# Altium PCB VBAT_to_12V.PcbDoc
Units mm, origin at the board's own origin, x right, y up, seen from the top; angles counter-clockwise.
Board outline 82.04 x 37.08 mm, 4 copper layers (Layer 1 (TOP), Layer 2 (GND), Layer 3 (GND), Layer 4 (BOTTOM)), stack 0.603 mm thick; 28 components, 38 nets, 82 pads, 112 vias.
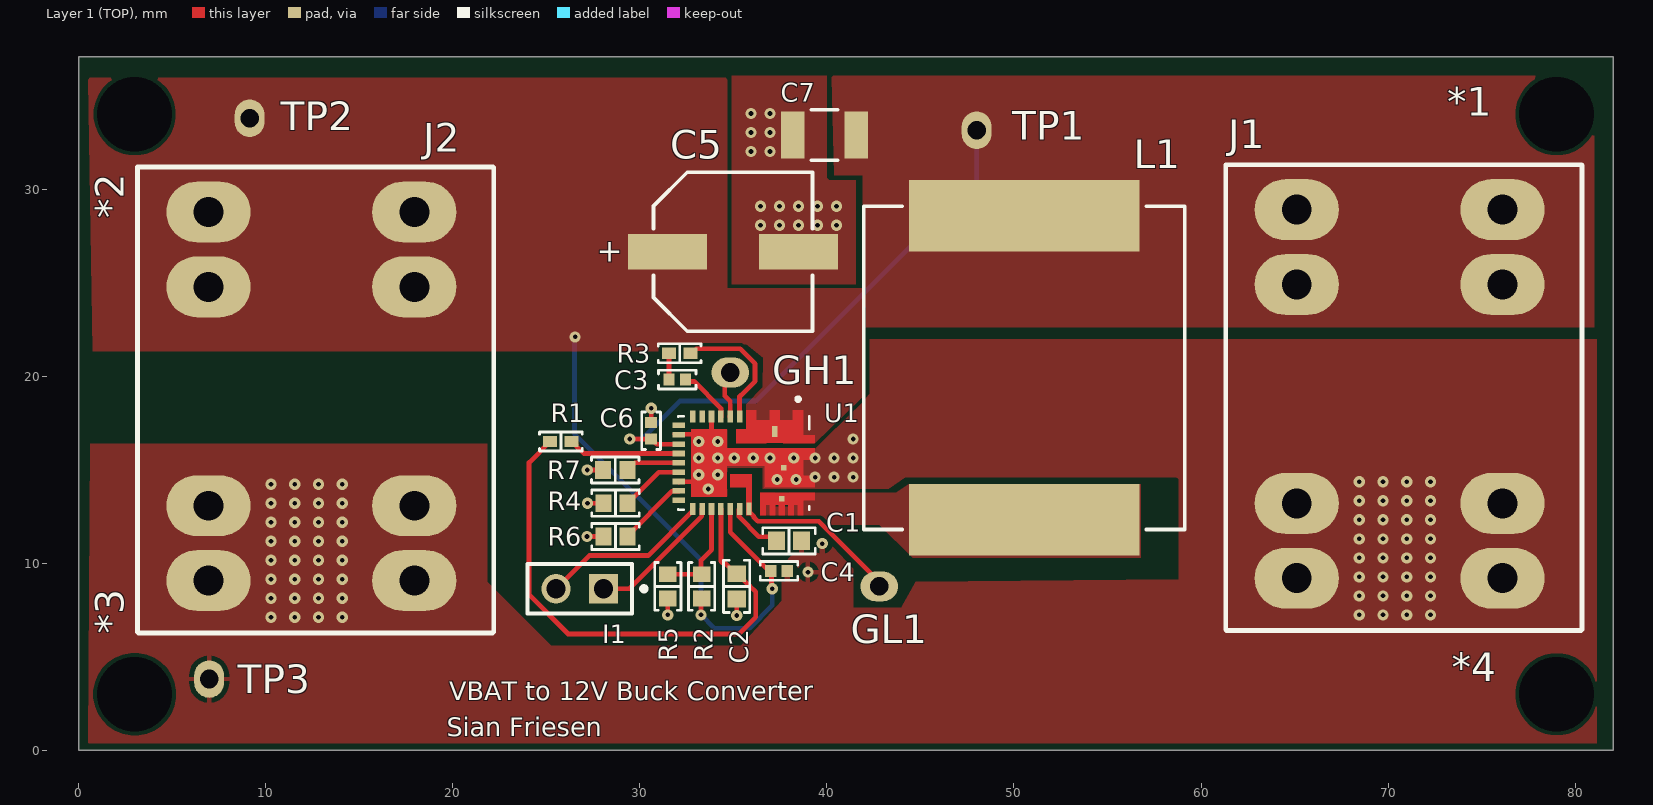
[diagram p0: Layer 1 (TOP) view]
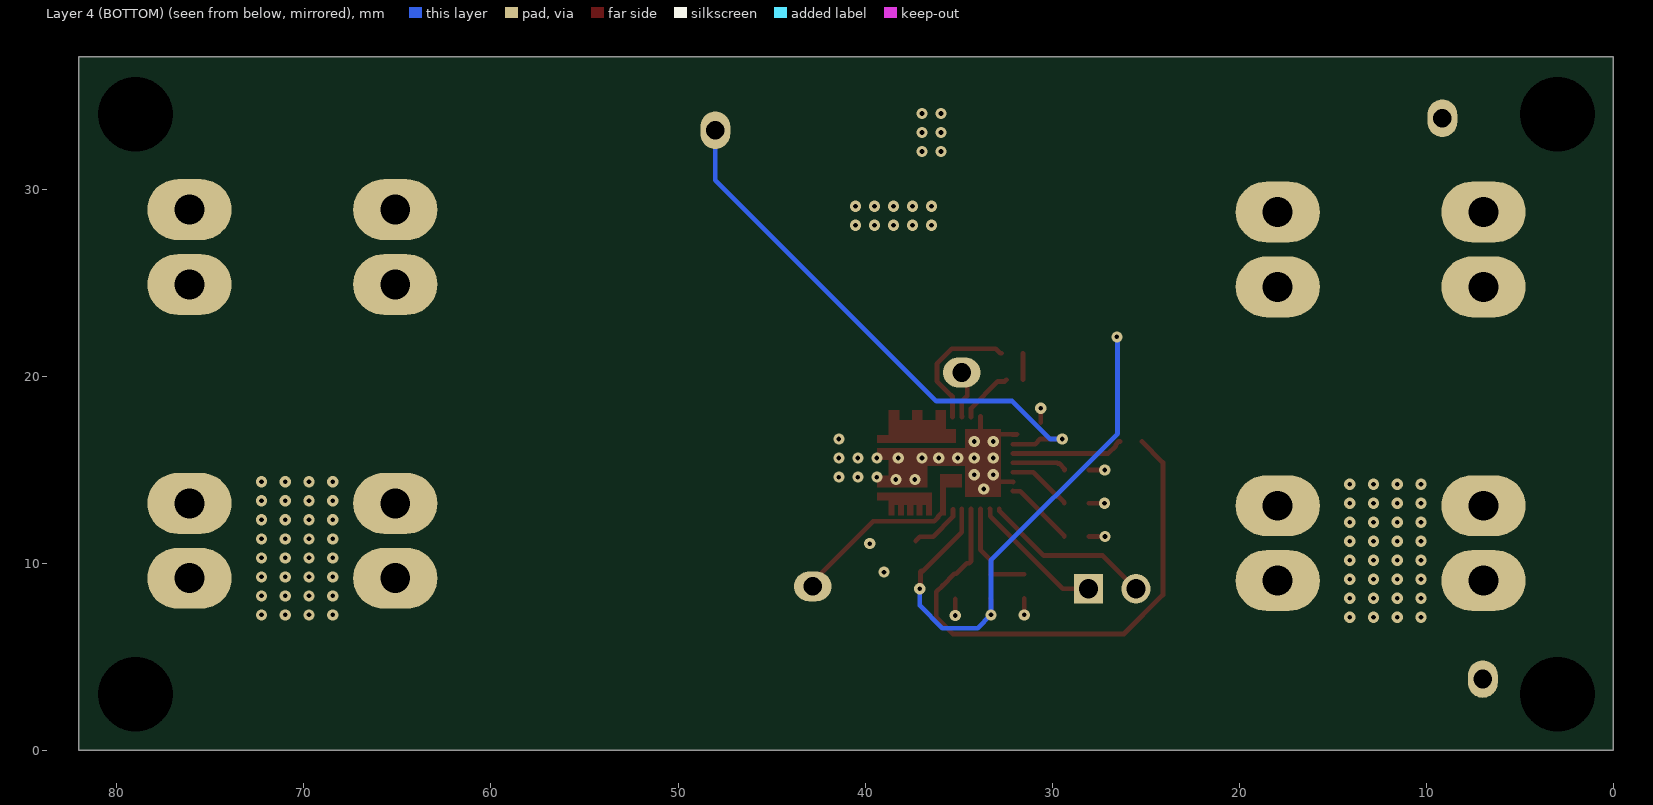
[diagram p1: Layer 4 (BOTTOM) view, seen from below]
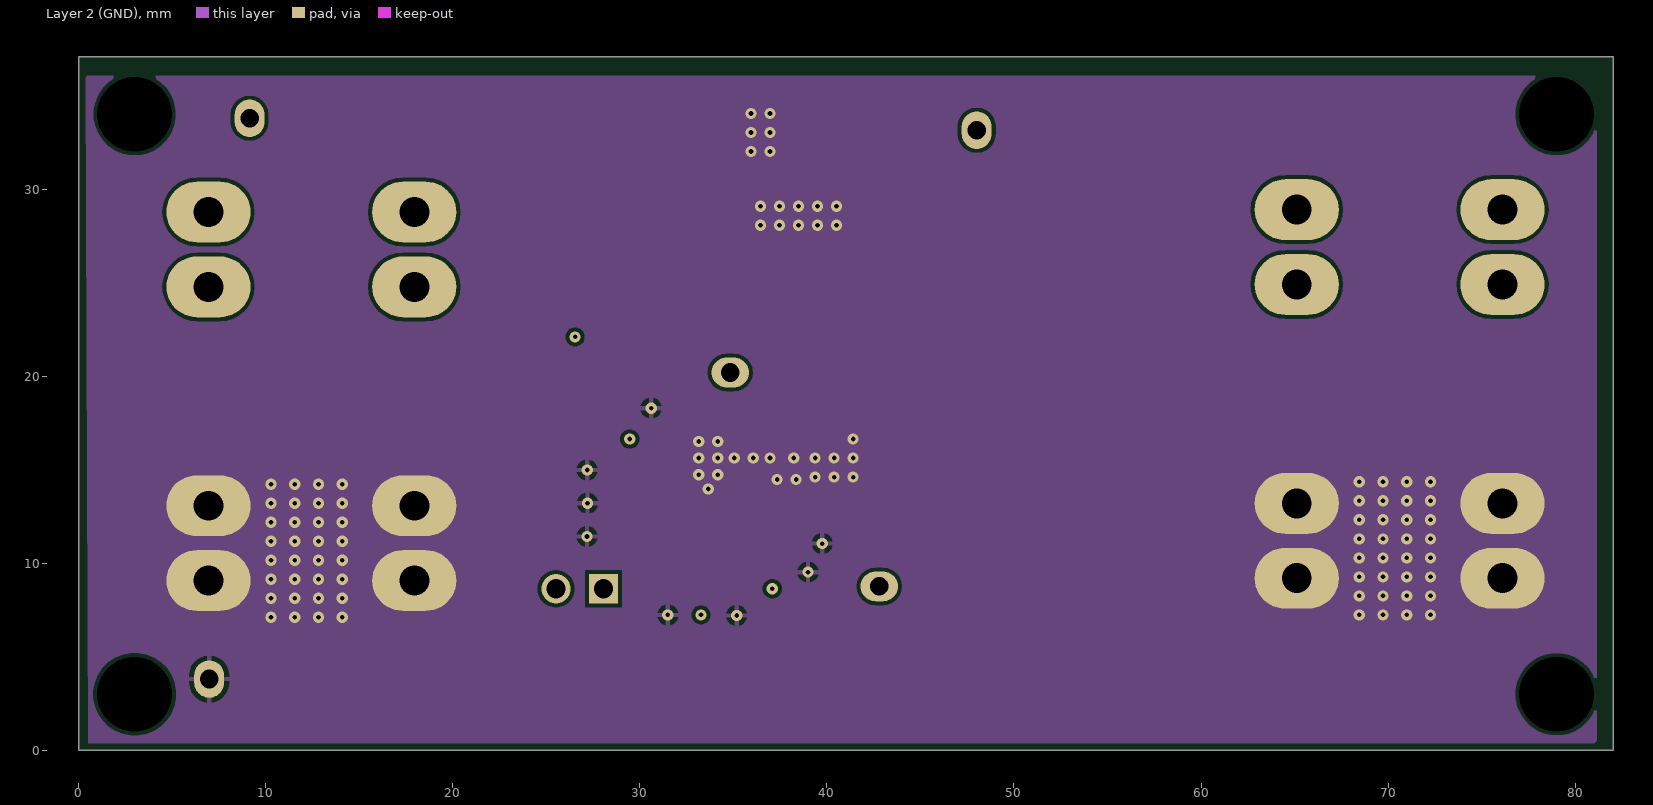
[diagram p2: Layer 2 (GND)]
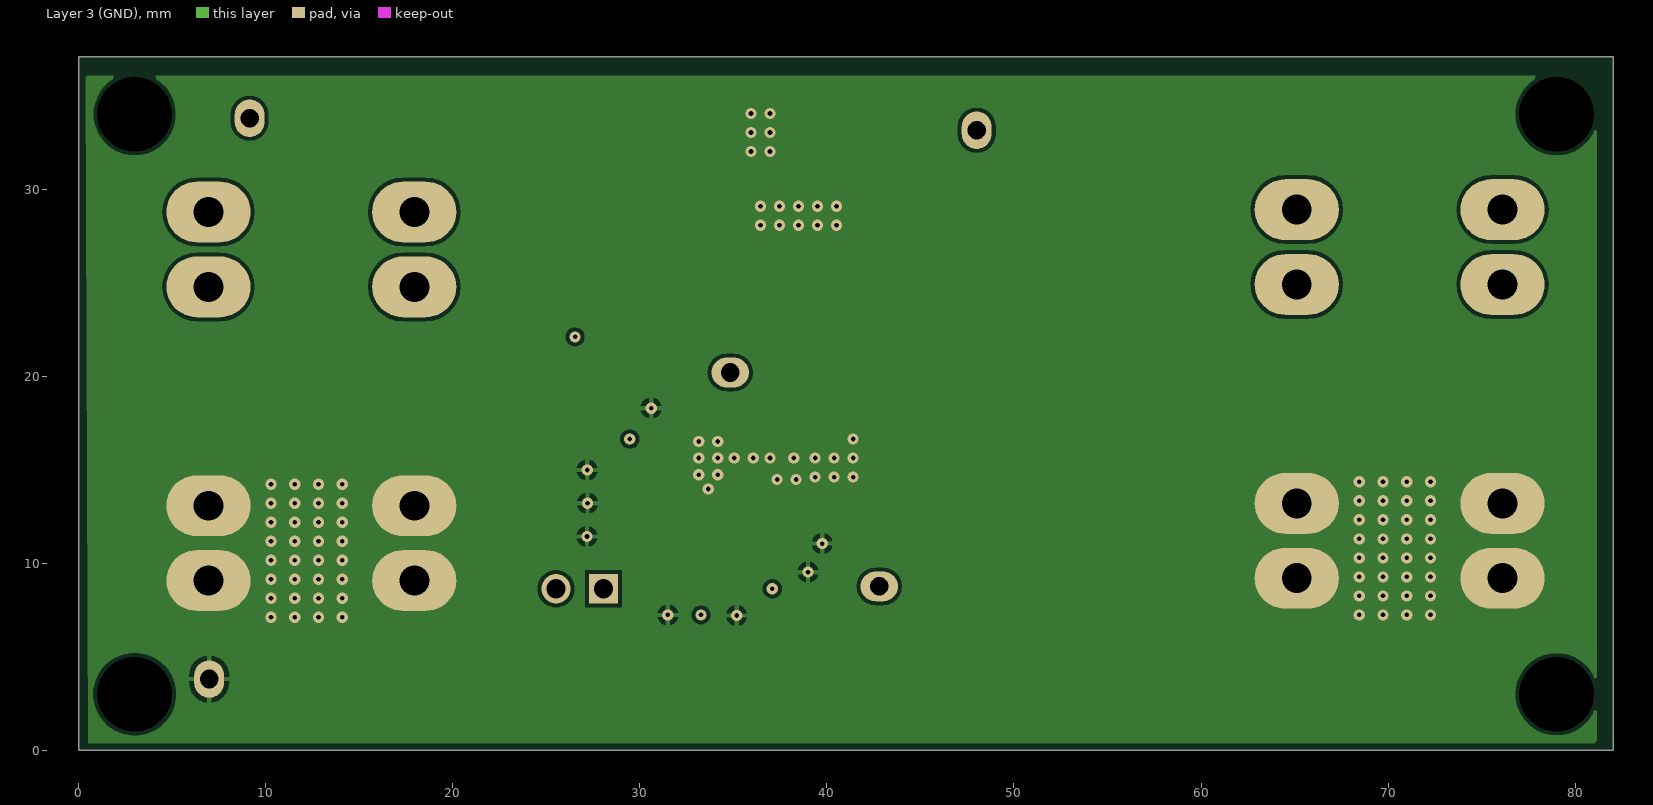
[diagram p3: Layer 3 (GND)]

## Layer stack, top to bottom
Top Solder: solder mask 0.0102, Solder Resist, Dk 3.5
Layer 1 (TOP): signal copper 0.035
Dielectric 3: prepreg 0.0711, PP-006, Dk 4.1
Layer 2 (GND): signal copper 0.0356
Dielectric 1: dielectric 0.32, FR-4, Dk 4.8
Layer 3 (GND): signal copper 0.0356
Dielectric 4: prepreg 0.0711, PP-006, Dk 4.1
Layer 4 (BOTTOM): signal copper 0.035
Bottom Solder: solder mask 0.0102, Solder Resist, Dk 3.5

## Board outline
0,0 82.042,0 82.042,37.084 0,37.084

## Design rules (kind name [scope] priority, off if disabled: settings)
BoardOutlineClearance [All] p1: gap=0.3 ignorepadtopadclearanceinfootprint=FALSE except(0.4: Arc-SplitBarrior Arc-SplitContinuation Track-SplitBarrior Track-SplitContinuation SMDPad-SplitBarrior SMDPad-SplitContinuation THPad-SplitBarrior THPad-SplitContinuation Via-SplitBarrior Via-SplitContinuation Fill-SplitBarrior Fill-SplitContinuation Poly-SplitBarrior Poly-SplitContinuation Region-SplitBarrior Region-SplitContinuation Text-SplitBarrior Text-SplitContinuation)
Clearance "Clearance Different Nets" [All] p1: gap=0.2 ignorepadtopadclearanceinfootprint=FALSE except(0.089: Arc-Arc Arc-Track Arc-SMDPad Track-Track Track-SMDPad; 0.127: SMDPad-SMDPad SMDPad-Via THPad-Via Via-Via; 0.254: Arc-Via Arc-Text Track-Via Track-Text SMDPad-Text THPad-Text Via-Text Fill-Text Poly-Text Region-Text Text-Text; 0.5: THPad-THPad Via-Hole)
Clearance "Clearance Same Nets" [All] p2: gap=0.2 ignorepadtopadclearanceinfootprint=FALSE except(0.089: Arc-Arc Arc-Track Arc-SMDPad Track-Track Track-SMDPad SMDPad-SMDPad; 0.127: SMDPad-Via THPad-Via; 0.254: Arc-Via Arc-Text Track-Via Track-Text SMDPad-Text THPad-Text Via-Via Via-Text Fill-Text Poly-Text Region-Text Text-Text)
Clearance "Clearance Bottom Layer" [OnLayer('Bottom Layer')] p3: gap=0.203 ignorepadtopadclearanceinfootprint=TRUE except(0.254: Arc-Text Track-Text SMDPad-Text THPad-Text Via-Text Fill-Text Poly-Text Region-Text Text-Text)
Clearance "Clearance Top Layer" [OnLayer('Top Layer')] p4: gap=0.203 ignorepadtopadclearanceinfootprint=TRUE except(0.254: Arc-Text Track-Text SMDPad-Text THPad-Text Via-Text Fill-Text Poly-Text Region-Text Text-Text)
HoleSize [All] p1: absolutevalues=TRUE maxlimit=6.3 minlimit=0.2 maxpercent=80.000 minpercent=20.000
MinimumAnnularRing [All] p1: minimumring=0.13
MinimumSolderMaskSliver [All] p1: minsoldermaskwidth=0.1
PolygonConnect PolygonConnect_1 [All] p1: thpad.connectstyle=Relief thpad.reliefconductorwidth=0.508 thpad.reliefentries=4 thpad.polygonreliefangle="90 Angle" thpad.airgapwidth=0.254 smdpad.connectstyle=Relief smdpad.reliefconductorwidth=0.508 smdpad.reliefentries=4 smdpad.polygonreliefangle="90 Angle" smdpad.airgapwidth=0.254 via.connectstyle=Direct via.reliefconductorwidth=0.508 via.reliefentries=4 via.polygonreliefangle="90 Angle" via.airgapwidth=0.254
RoutingCorners [All] p1: cornerstyle=Round minsetback=2.54 maxsetback=2.54
RoutingVias [All] p1: holewidth=0.5 width=1 viastyle="Through Hole" minholewidth=0.2 minwidth=0.35 maxholewidth=1 maxwidth=2
SilkToSilkClearance [All] p1: silktosilkclearance=0.1
SilkToSolderMaskClearance [IsPad] p1: minsilkscreentomaskgap=0.1 clearancetoexposedcopper=TRUE
SolderMaskExpansion [All] p1: expansion=0.102 istentingtop=FALSE
Width [All] p1: maxlimit=2.54 minlimit=0.089 preferedwidth=0.381
25 further rules are at their usual default settings.

## Classes and differential pairs
component class "Current Sensing": C16 I3 J8 J9 J10 TP8 TP9 TP10 TP11 U7

## Components (designator, comment, footprint, x,y, rotation, side; value= is the part's Value field where it differs from the comment)
*1 "Mounting_hole" Mounting_Hole 79,34 r0 top
*2 "Mounting_hole" Mounting_Hole 3,34 r0 top
*3 "Mounting_hole" Mounting_Hole 3,3 r0 top
*4 "Mounting_hole" Mounting_Hole 79,3 r0 top
C1 "4.7µF" "CAP 0603_1608" 37.973,11.195 r180 top
C2 "1 µF" "CAP 0603_1608" 35.179,8.763 r90 top
C3 "0.1 µF" "CAP 0402_1005" 32.004,19.812 r180 top
C4 "0.1 µF" "CAP 0402_1005" 37.442,9.591 r180 top
C5 "875075655006" WCAP-PSLC_D8H11.7 -1235.019,-1243.352 r180 top
C6 "0.1 µF" "CAP 0402_1005" 30.607,17.086 r270 top
C7 "TMK325B7226MM-TR" FP-1210-L_3_2_0_3-W_2_5_0-MFG 39.878,32.893 r180 top
GH1 "TP_1" Test_point1 34.832,20.193 r0 top
GL1 "TP_1" Test_point1 42.799,8.763 r180 top
I1 "M20-9990246" FP-M20-9990246-MFG 26.792,8.636 r180 top
J1 "0399200302" 0399200302 70.612,19.05 r0 top
J2 "0399200302" 0399200302 12.446,18.923 r0 top
L1 "IHLP6767GZERR47M51" FP-IHLP-6767GZ-FP_3_825x1-MFG 50.546,20.447 r90 top
R1 "100 kOhms" "RES 0402_1005" 25.781,16.51 r0 top
R2 "562 kOhms" "RES 0603_1608" 33.306,8.763 r270 top
R3 "3.3 Ohms" "RES 0402_1005" 32.131,21.224 r0 top
R4 "11 kOhms" "RES 0603_1608" 28.702,13.208 r0 top
R5 "309 kOhms" "RES 0603_1608" 31.496,8.763 r90 top
R6 "2.87 kOhms" "RES 0603_1608" 28.702,11.43 r0 top
R7 "3.48 kOhms" "RES 0603_1608" 28.687,14.986 r0 top
TP1 "TP_1" TEST_POINT1 48.006,33.147 r90 top
TP2 "TP_1" TEST_POINT1 9.144,33.782 r90 top
TP3 "TP_1" TEST_POINT1 6.985,3.81 r90 top
U1 "SIC450ED-T1-GE3" VREG_SIC450ED-T1-GE3 35.56,15.367 r270 top

## Footprints (in the part's own frame and the unit in brackets; to place one, negate y for a bottom-side part, rotate by r counter-clockwise, add the part's x,y. Pads: shape width x height; smd on the part's side, far side on the other; paste and mask are expansions set on the pad)
0399200302 [mm] "Connector"
  oval 4.5x3.25 hole 1.6: 1(-5.5,5.85) 1(-5.5,9.85) 1(5.5,5.85) 1(5.5,9.85) 2(-5.5,-9.85) 2(-5.5,-5.85) 2(5.5,-9.85) 2(5.5,-5.85)
  silkscreen extent -9.3,-12.65 9.75,12.25
"CAP 0402_1005" [mm] "Chip Capacitor, 2-Leads, Body 1.02x0.51mm, IPC Medium Density"
  rect 0.6x0.64 smd: 1(-0.44,0) 2(0.44,0)
  silkscreen extent -1,-0.5 1,0.5, body extent -0.5,-0.26 0.5,0.26, height 0.52
"CAP 0603_1608" [mm] "Chip Capacitor, 2-Leads, Body 1.60x0.80mm, IPC Medium Density"
  rect 0.9x1 smd: 1(-0.675,0) 2(0.675,0)
  silkscreen extent -1.4,-0.7 1.4,0.7, body extent -0.8,-0.41 0.8,0.41, height 0.82
FP-1210-L_3_2_0_3-W_2_5_0-MFG [mm]
  rect 1.25x2.5 smd paste+0 mask+0: 1(-1.7,0) 2(1.7,0)
  silkscreen extent -0.7,-1.35 0.7,1.35, body extent -2.42,-1.45 2.42,1.45, height 0.25
FP-IHLP-6767GZ-FP_3_825x1-MFG [mm]
  rect 3.825x12.32 smd paste+0 mask+0: 1(-8.117,0) 2(8.117,0)
  silkscreen extent -8.64,-8.57 8.64,8.57, body extent -10.13,-8.67 10.13,8.67, height 0.25
FP-M20-9990246-MFG [mm]
  rect 1.57x1.57 hole 1.02 paste-2539.97 mask+0: 1(-1.27,0)
  round 1.57 hole 1.02 paste-2539.97 mask+0: 2(1.27,0)
  silkscreen extent -3.55,-1.32 2.79,1.32, body extent -2.89,-1.42 2.89,1.42, height 0.25
Mounting_Hole [mil]
  round 60 hole 157.48 unplated: 1(0,0)
"RES 0402_1005" [mm] "Chip Resistor, 2-Leads, Body 1.0x0.5mm, IPC Medium Density"
  rect 0.75x0.6 smd: 1(-0.575,0) 2(0.575,0)
  silkscreen extent -1.14,-0.51 1.14,0.51, body extent -0.5,-0.25 0.5,0.25, height 0.35
"RES 0603_1608" [mm] "Chip Resistor, 2-Leads, Body 1.60x0.80mm, IPC Medium Density"
  rect 0.85x0.95 smd: 1(-0.65,0) 2(0.65,0)
  silkscreen extent -1.27,-0.7 1.27,0.7, body extent -0.8,-0.4 0.8,0.4, height 0.45
Test_point1 [mm]
  oval 2x1.6 hole 1: 1(0,0)
TEST_POINT1 [mm]
  oval 2x1.6 hole 1: 1(0,0)
VREG_SIC450ED-T1-GE3 [mm]
  rect 0.6x0.3 smd paste-1 mask+0: 1_3_34(-1.677,1.65)
  rect 0.65x0.3 smd mask+0: 4(-2.475,-0.225) 5(-2.475,-0.725) 6(-2.475,-1.225) 7(-2.475,-1.725) 8(-2.475,-2.225) 9(-2.475,-2.725) 19(2.475,-2.725) 20(2.475,-2.225) 21(2.475,-1.725) 22(2.475,-1.225) 23(2.475,-0.725) 24(2.475,-0.225)
  rect 0.3x0.65 smd mask+0: 10(-2,-3.475) 11(-1.5,-3.475) 12(-1,-3.475) 13(-0.5,-3.475) 14(0,-3.475) 15(0.5,-3.475) 16(1,-3.475) 17(1.5,-3.475) 18(2,-3.475)
  rect 0.65x0.25 smd paste-1 mask+0: 25(2.45,0.275)
  rect 0.3x0.3 smd paste-1 mask+0: 26_31(1.924,2.025) 32_33(0.262,2.14)
  Layer 1 (TOP) region: 1.998,3.175 2.8,3.175 2.8,2.875 2.25,2.875 2.25,2.675 2.8,2.675 2.8,2.375 2.25,2.375 2.25,2.175 2.8,2.175 2.8,1.875 2.25,1.875 2.25,1.675 2.8,1.675 2.8,1.375 2.25,1.375 2.25,1.175 2.8,1.175 2.8,0.875 1.598,0.875 1.598,3.8 1.998,3.8
  Layer 1 (TOP) region: 2.8,0.125 1.298,0.125 1.298,-0.725 0.603,-0.725 0.603,0.425 2.8,0.425
  Layer 1 (TOP) region: 1.298,1.105 0.155,1.105 0.155,-0.925 1.8,-0.925 1.8,-2.8 -1.8,-2.8 -1.8,-0.925 -0.775,-0.925 -0.775,3.8 -0.175,3.8 -0.175,3.175 0.698,3.175 0.698,3.8 1.298,3.8
  Layer 1 (TOP) region: -1.075,-0.4 -1.8,-0.4 -1.8,0.125 -2.8,0.125 -2.8,0.675 -2.28,0.675 -2.28,1.375 -2.8,1.375 -2.8,1.925 -2.28,1.925 -2.28,2.625 -2.8,2.625 -2.8,3.175 -1.475,3.175 -1.475,3.8 -1.075,3.8
  silkscreen extent -3.5,-3.5 2.5,3.5, body extent -2.5,-3.5 2.5,3.5, height 0.8
WCAP-PSLC_D8H11.7 [mm] "Aluminum Polymer Capacitor, Diameter 8mm"
  rect 4.2x1.9 smd: 1(-1266.5,-1270) 2(-1273.5,-1270)
  silkscreen extent -1274.25,-1274.25 -1265.75,-1265.75, body extent -1274.5,-1274.15 -1265.5,-1265.85, height 11.7

## Part data
C1: library part 06036D475KAT4A, "CAP CER 4.7UF 6.3V X5R 0603", Device Package="0603 (1608 Metric)", Manufacturer="AVX Corporation", Operating Temperature="-55°C ~ 85°C", Supplier Part Number 1=478-10813-1-ND, Temperature Coefficient=X5R, Tolerance=±10%, Voltage - Rated=6.3V, Applications="General Purpose", Capacitance=4.7µF, ComponentLink1Description=Datasheet, ComponentLink1URL=http://datasheets.avx.com/cx5r.pdf, ComponentLink2Description="DigiKey Link", ComponentLink2URL=http://digikey.com/product-detail/en/avx-corporation/06036D475KAT4A/478-10813-1-ND/7536337, lastupdated="2020-09-02 1:03:34 AM", Lifecycle Status=Active, Minimum Order=1, Mounting Type="Surface Mount, MLCC", Package / Case="0603 (1608 Metric)", Packaging=TapeAndReel, Part Number=06036D475KAT4A, Part Status=Active, partid=2929, price=0.02, Series=-, Size / Dimension="0.063\" L x 0.032\" W (1.60mm x 0.81mm)", Supplier 1=DigiKey, Thickness (Max)="0.037\" (0.94mm)"
C2: library part C0603X105M9RACAUTO, "CAP CER 1UF 6.3V X7R 0603", Device Package="0603 (1608 Metric)", Manufacturer=KEMET, Operating Temperature="-55°C ~ 125°C", Ratings=AEC-Q200, Supplier Part Number 1=399-17721-1-ND, Temperature Coefficient=X7R, Tolerance=±20%, Voltage - Rated=6.3V, Applications="Automotive, Boardflex Sensitive", Capacitance="1 µF", ComponentLink1Description=Datasheet, ComponentLink1URL=https://api.kemet.com/component-edge/download/datasheet/C0603X105M9RACAUTO.pdf, ComponentLink2Description="DigiKey Link", ComponentLink2URL=https://www.digikey.com/en/products/detail/kemet/C0603X105M9RACAUTO/8635848, Features="Soft Termination", lastupdated="2024-01-28 8:09:58 PM", Lifecycle Status=Active, Minimum Order=1, Mounting Type="Surface Mount, MLCC", Package / Case="0603 (1608 Metric)", Packaging=TapeAndReel, Part Number=C0603X105M9RACAUTO, Part Status=Active, partid=2401, price=0.06, Series="SMD Auto X7R Flex", Size / Dimension="0.063\" L x 0.031\" W (1.60mm x 0.80mm)", Supplier 1=DigiKey, Thickness (Max)="0.037\" (0.95mm)"
C3: library part CL05B104KP5VPNC, "CAP CER 100NF 10V X7R 0402", Device Package="0402 (1005 Metric)", Manufacturer="Samsung Electro-Mechanics", Operating Temperature="-55°C ~ 125°C", Ratings=AEC-Q200, Supplier Part Number 1=1276-CL05B104KP5VPNCCT-ND, Temperature Coefficient=X7R, Tolerance=±10%, Voltage - Rated=10V, Applications=Automotive, Capacitance="0.1 µF", ComponentLink1Description=Datasheet, ComponentLink1URL=https://mm.digikey.com/Volume0/opasdata/d220001/medias/docus/5458/CL05B104KP5VPNC_Spec.pdf, ComponentLink2Description="DigiKey Link", ComponentLink2URL=https://www.digikey.com/en/products/detail/samsung-electro-mechanics/CL05B104KP5VPNC/20498482, lastupdated="2024-01-28 8:02:59 PM", Lifecycle Status=Active, Minimum Order=1, Mounting Type="Surface Mount, MLCC", Package / Case="0402 (1005 Metric)", Packaging=TapeAndReel, Part Number=CL05B104KP5VPNC, partid=56690, price=0.01, Series=CL, Size / Dimension="0.039\" L x 0.020\" W (1.00mm x 0.50mm)", Supplier 1=DigiKey, Thickness (Max)="0.022\" (0.55mm)"
C4 C6: library part GCM155R71E104KE02D, "CAP CER 0.1UF 25V X7R 0402", Device Package="0402 (1005 Metric)", Manufacturer="Murata Electronics", Operating Temperature="-55°C ~ 125°C", Ratings=AEC-Q200, Supplier Part Number 1=490-16431-1-ND, Temperature Coefficient=X7R, Tolerance=±10%, Voltage - Rated=25V, Applications=Automotive, Capacitance="0.1 µF", ComponentLink1Description=Datasheet, ComponentLink1URL=https://search.murata.co.jp/Ceramy/image/img/A01X/G101/ENG/GCM155R71E104KE02-01.pdf, ComponentLink2Description="DigiKey Link", ComponentLink2URL=https://www.digikey.com/en/products/detail/murata-electronics/GCM155R71E104KE02D/7363175, Lifecycle Status=Active, Minimum Order=1, Mounting Type="Surface Mount, MLCC", Package / Case="0402 (1005 Metric)", Packaging=TapeAndReel, Part Number=GCM155R71E104KE02D, Part Status=Active, partid=2051, price=0.01, Series=GCM, Size / Dimension="0.039\" L x 0.020\" W (1.00mm x 0.50mm)", Supplier 1=DigiKey, Thickness (Max)="0.022\" (0.55mm)"
  C4: lastupdated="2024-02-09 8:04:37 PM"
  C6: lastupdated="2024-01-28 8:04:19 PM"
C5: library part CMP-03913-90235614-1, "875075655006 Cap, 150Uf, 35V, Alu Elec Smd, Polymer Rohs Compliant: Yes", Capacitance=150µF, ESR (Equivalent Series Resistance)=25mΩ, Leakage Current=840µA, Max Operating Temperature=105°C, Min Operating Temperature=-55°C, Ripple Current=3.8A, Voltage Rating=35V, Diameter=8mm, Length=11.7mm, NexarPartId=90235614, RoHS=Compliant, Width=8.3mm
C7: library part CMP-14477-000122-1, "CAP CER 22UF 25V X7R 1210", Capacitance=22uF, Case Code (Imperial)=1210, Case Code (Metric)=3225, Dielectric=X7R, Max Operating Temperature=125°C, Min Operating Temperature=-55°C, Package Quantity=500, Resistor Type=Ceramic, Tolerance=20%, Voltage=25V, Case/Package=1210, Construction=Flat, Depth=2.5mm, Halogen Free="Halogen Free", Height=2.5mm, Lead Free="Lead Free", Length=3.2mm, Mount="Surface Mount", Number of Pins=2, Packaging="Tape and Reel", Radiation Hardening=No, REACH SVHC="No SVHC", RoHS Compliant=Yes, Series=M, Termination=SMD/SMT, Thickness=0.106inch, Voltage Rating=25V, Voltage Rating (DC)=25V, Width=0.098inch
GH1 GL1 TP1 TP2 TP3: library part Test_point1
I1: library part CMP-15831-000009-1, "CONN HEADER VERT 2POS 2.54MM", Current Rating=3A, Manufacturer=Harwin, Temperature="-40°C to +105°C", Temperature Range High=+105°C, Temperature Range Low=-40°C, Automotive=No, Category=Conn, ComponentLink2Description=Datasheet, ComponentLink2URL=https://cdn.harwin.com/pdfs/M20-999.pdf, Conn Gender=Male, Conn Orientation=Vertical, Contact Material=Tin,Nickel, Device Class L1=Connectors, Device Class L2="Headers and Wire Housings", Device Class L3=unset, Digikey Description="CONN HEADER VERT 2POS 2.54MM", Height=8.99mm, Lead Free=Yes, Manufacturer Part Number=M20-9990246, Mouser Description="2.54mm (0.1\") Pitch SIL Vertical PC Tail Pin Header, 6.1mm mating pin height, tin, 2 contacts", Number of Contacts=2, Number of Rows=1, Octopart=https://octopart.com/m20-9990246-harwin-2590635, Package=M20-9990246, Pitch=2.54mm, RoHS=TRUE
L1: library part CMP-02424-000445-1, "Commercial Inductors, High Temperature (155 °C) Series 0.47uH 65A 0.95mΩ 20%", Case/Package=6767, Current Rating=65A, DC Resistance (DCR)=0.95mR, Inductance=470nH, Inductance Tolerance=20%, Max DC Current=63A, Max Operating Temperature=155°C, Min Operating Temperature=-55°C, Package Quantity=200, Resistance=950R, Saturation Current=76A, Self Resonant Frequency=52.3MHz, Test Frequency=100kHz, Depth=17.5mm, Height=7mm, Height - Seated (Max)=0.276inch, Lead Free="Lead Free", Length=0.675inch, Mount="Surface Mount", Packaging="Tape and Reel", Radiation Hardening=No, RMS Current (Irms)=63A, Shielding=Shielded, Termination=SMD/SMT, Tolerance=20%, Weight=0.417996oz, Width=17.15mm
R1: library part RT0402FRE07100KL, "RES SMD 100K OHM 1% 1/16W 0402", Device Package="0402 (1005 Metric)", Manufacturer=Yageo, Operating Temperature="-55°C ~ 155°C", Power (Watts)="0.063W, 1/16W", Supplier Device Package=0402, Supplier Part Number 1=YAG2307CT-ND, Temperature Coefficient=±50ppm/°C, Tolerance=±1%, ComponentLink1Description=Datasheet, ComponentLink1URL=https://www.yageo.com/upload/media/product/productsearch/datasheet/rchip/PYu-RT_1-to-0.01_RoHS_L_11.pdf, ComponentLink2Description="DigiKey Link", ComponentLink2URL=https://www.digikey.com/en/products/detail/yageo/RT0402FRE07100KL/1071698, Composition="Thin Film", Height - Seated (Max)="0.014\" (0.35mm)", lastupdated="2024-01-28 8:28:38 PM", Lifecycle Status=Active, Minimum Order=1, Number of Terminations=2, Package / Case="0402 (1005 Metric)", Packaging=TapeAndReel, Part Number=RT0402FRE07100KL, Part Status=Active, partid=3190, price=0.01, Resistance="100 kOhms", Series=RT, Size / Dimension="0.039\" L x 0.020\" W (1.00mm x 0.50mm)", Supplier 1=DigiKey
R2: library part RK73H1JTTD5623F, "RES 562K OHM 1% 1/10W 0603", Device Package="0603 (1608 Metric)", Manufacturer="KOA Speer Electronics, Inc.", Operating Temperature="-55°C ~ 155°C", Power (Watts)="0.1W, 1/10W", Ratings=AEC-Q200, Supplier Device Package=0603, Supplier Part Number 1=2019-RK73H1JTTD5623FCT-ND, Temperature Coefficient=±100ppm/°C, Tolerance=±1%, ComponentLink1Description=Datasheet, ComponentLink1URL=http://www.koaspeer.com/catimages/Products/RK73H/RK73H.pdf, ComponentLink2Description="DigiKey Link", ComponentLink2URL=https://www.digikey.com/en/products/detail/koa-speer-electronics-inc/RK73H1JTTD5623F/9845175, Composition="Thick Film", Features="Automotive AEC-Q200, Moisture Resistant", Height - Seated (Max)="0.022\" (0.55mm)", lastupdated="2024-01-28 8:39:45 PM", Lifecycle Status=Active, Minimum Order=1, Number of Terminations=2, Package / Case="0603 (1608 Metric)", Packaging=CutTape, Part Number=RK73H1JTTD5623F, Part Status=Active, partid=8595, price=0.01, Resistance="562 kOhms", Series=RK73H, Size / Dimension="0.063\" L x 0.031\" W (1.60mm x 0.80mm)", Supplier 1=DigiKey
R3: library part ERJ-2GEJ3R3X, "RES SMD 3.3 OHM 5% 1/10W 0402", Device Package="0402 (1005 Metric)", Manufacturer="Panasonic Electronic Components", Operating Temperature="-55°C ~ 155°C", Power (Watts)="0.1W, 1/10W", Ratings=AEC-Q200, Supplier Device Package=0402, Supplier Part Number 1=P3.3JCT-ND, Temperature Coefficient="-100/ +600ppm/°C", Tolerance=±5%, ComponentLink1Description=Datasheet, ComponentLink1URL=https://b2b-api.panasonic.eu/file_stream/pids/fileversion/1242, ComponentLink2Description="DigiKey Link", ComponentLink2URL=https://www.digikey.com/en/products/detail/panasonic-electronic-components/ERJ-2GEJ3R3X/282082, Composition="Thick Film", Features="Automotive AEC-Q200", Height - Seated (Max)="0.016\" (0.40mm)", lastupdated="2024-01-28 8:28:37 PM", Lifecycle Status=Active, Minimum Order=1, Number of Terminations=2, Package / Case="0402 (1005 Metric)", Packaging=CutTape, Part Number=ERJ-2GEJ3R3X, Part Status=Active, partid=3568, price=0.01, Resistance="3.3 Ohms", Series=ERJ-2G, Size / Dimension="0.039\" L x 0.020\" W (1.00mm x 0.50mm)", Supplier 1=DigiKey
R4: library part TNPW060311K0BYEN, "RES 11K OHM 0.1% 1/10W 0603", Device Package="0603 (1608 Metric)", Manufacturer="Vishay Dale", Operating Temperature="-55°C ~ 155°C", Power (Watts)="0.1W, 1/10W", Ratings=AEC-Q200, Supplier Device Package=0603, Supplier Part Number 1=541-9816-1-ND, Temperature Coefficient=±10ppm/°C, Tolerance=±0.1%, ComponentLink1Description=Datasheet, ComponentLink1URL=http://www.vishay.com/docs/28758/tnpw_e3.pdf, ComponentLink2Description="DigiKey Link", ComponentLink2URL=https://www.digikey.com/en/products/detail/vishay-dale/TNPW060311K0BYEN/8636632, Composition="Thin Film", Features="Anti-Sulfur, Automotive AEC-Q200, Moisture Resistant", Height - Seated (Max)="0.022\" (0.55mm)", lastupdated="2024-01-28 8:39:55 PM", Lifecycle Status=Active, Minimum Order=1, Number of Terminations=2, Package / Case="0603 (1608 Metric)", Packaging=TapeAndReel, Part Number=TNPW060311K0BYEN, Part Status=Active, partid=6393, price=0.25, Resistance="11 kOhms", Series="TNPW e3", Size / Dimension="0.061\" L x 0.033\" W (1.55mm x 0.85mm)", Supplier 1=DigiKey
R5: library part RG1608P-3093-B-T5, "RES SMD 309K OHM 0.1% 1/10W 0603", Device Package="0603 (1608 Metric)", Manufacturer=Susumu, Operating Temperature="-55°C ~ 155°C", Power (Watts)="0.1W, 1/10W", Ratings=AEC-Q200, Supplier Device Package=0603, Supplier Part Number 1=RG16P309KBCT-ND, Temperature Coefficient=±25ppm/°C, Tolerance=±0.1%, ComponentLink1Description=Datasheet, ComponentLink1URL=//media.digikey.com/pdf/Data%20Sheets/Susumu%20PDFs/RG_RM_RGH_Oct2012.pdf, ComponentLink2Description="DigiKey Link", ComponentLink2URL=https://www.digikey.com/en/products/detail/susumu/RG1608P-3093-B-T5/1240553, Composition="Thin Film", Features="Anti-Sulfur, Automotive AEC-Q200", Height - Seated (Max)="0.020\" (0.50mm)", lastupdated="2024-01-28 8:39:51 PM", Lifecycle Status=Active, Minimum Order=1, Number of Terminations=2, Package / Case="0603 (1608 Metric)", Packaging=TapeAndReel, Part Number=RG1608P-3093-B-T5, Part Status=Active, partid=7313, price=0.05, Resistance="309 kOhms", Series=RG, Size / Dimension="0.063\" L x 0.031\" W (1.60mm x 0.80mm)", Supplier 1=DigiKey
R6: library part RC0603FR-072K87L, "RES 2.87K OHM 1% 1/10W 0603", Device Package="0603 (1608 Metric)", Manufacturer=Yageo, Operating Temperature="-55°C ~ 155°C", Power (Watts)="0.1W, 1/10W", Supplier Device Package=0603, Supplier Part Number 1=311-2.87KHRCT-ND, Temperature Coefficient=±100ppm/°C, Tolerance=±1%, ComponentLink1Description=Datasheet, ComponentLink1URL=https://www.yageo.com/upload/media/product/productsearch/datasheet/rchip/PYu-RC_Group_51_RoHS_L_10.pdf, ComponentLink2Description="DigiKey Link", ComponentLink2URL=https://www.digikey.com/en/products/detail/yageo/RC0603FR-072K87L/727036, Composition="Thick Film", Features="Moisture Resistant", Height - Seated (Max)="0.022\" (0.55mm)", lastupdated="2024-01-28 8:39:50 PM", Lifecycle Status=Active, Minimum Order=1, Number of Terminations=2, Package / Case="0603 (1608 Metric)", Packaging=CutTape, Part Number=RC0603FR-072K87L, Part Status=Active, partid=7498, price=0.01, Resistance="2.87 kOhms", Series=RC_L, Size / Dimension="0.063\" L x 0.031\" W (1.60mm x 0.80mm)", Supplier 1=DigiKey
R7: library part RNCP0603FTD3K48, "RES 3.48K OHM 1% 1/8W 0603", Device Package="0603 (1608 Metric)", Manufacturer="Stackpole Electronics Inc", Operating Temperature="-55°C ~ 155°C", Power (Watts)="0.125W, 1/8W", Supplier Device Package=0603, Supplier Part Number 1=RNCP0603FTD3K48CT-ND, Temperature Coefficient=±100ppm/°C, Tolerance=±1%, ComponentLink1Description=Datasheet, ComponentLink1URL=https://www.seielect.com/catalog/sei-rncp.pdf, ComponentLink2Description="DigiKey Link", ComponentLink2URL=https://www.digikey.com/en/products/detail/stackpole-electronics-inc/RNCP0603FTD3K48/2240122, Composition="Thin Film", Features=Anti-Sulfur, Height - Seated (Max)="0.020\" (0.50mm)", lastupdated="2024-01-28 8:39:52 PM", Lifecycle Status=Active, Minimum Order=1, Number of Terminations=2, Package / Case="0603 (1608 Metric)", Packaging=TapeAndReel, Part Number=RNCP0603FTD3K48, Part Status=Active, partid=6983, price=0.01, Resistance="3.48 kOhms", Series=RNCP, Size / Dimension="0.059\" L x 0.031\" W (1.50mm x 0.80mm)", Supplier 1=DigiKey
U1: library part CMP-351-000000-4, "Buck Switching Regulator IC Positive Adjustable 0.3V 1 Output 40A 34-PowerWFQFN", Package="PowerWFQFN-34 Vishay Siliconix", Availability="In Stock", Check_prices=https://www.snapeda.com/parts/SIC450ED-T1-GE3/Vishay+Siliconix/view-part/?ref=eda, Component Type=Standard, Design Item ID=SIC450ED-T1-GE3, MF="Vishay Siliconix", MP=SIC450ED-T1-GE3, Pin Count=25, price=None, Purchase-URL=https://pricing.snapeda.com/search/part/SIC450ED-T1-GE3/?ref=eda, SnapEDA_Link=https://www.snapeda.com/parts/SIC450ED-T1-GE3/Vishay+Siliconix/view-part/?ref=snap, Source=SIC450ED-T1-GE3.SchLib

## Via types
v1: diameter 0.6, hole 0.25, Layer 1 (TOP) to Layer 4 (BOTTOM), 112 vias

## Nets (pads, with @x,y where several pads share a name; then routed paths per layer and width w, separated by ;. In a path a pad name is that pad's centre, name@x,y a point inside that pad or via, vN(x,y) a via of type N, cw(c..) or ccw(c..) an arc to the next point about the centre after c; other vN are vias at no path point)
+3V3: 
+5V: 
+12V: C6.2 C7.1 J1.1 L1.2 TP1.1 U1.12 | length 29.7
  Layer 1 (TOP) w0.254: v1(29.464,16.637) 29.468,16.641 30.603,16.641 C6.2 30.627,16.646 30.906,16.367 U1.12@32.11,16.367
  Layer 4 (BOTTOM) w0.254: v1(29.464,16.637) 30.099,16.637 32.131,18.669 36.195,18.669 48.006,30.48 TP1.1
GND: C1.1 C2.1 C4.1 C5.2 C6.1 C7.2 J1.2 J2.2 R4.1 R5.1 R6.1 R7.1 TP3.1 U1.7 U1.11 U1.16 U1.32_33 | length 15.6
  Layer 1 (TOP) w0.254: v1(27.178,11.43) R6.1 ; v1(27.185,14.986) R7.1 ; v1(27.2,13.208) R4.1 ; C6.1 v1(30.607,18.288) ; v1(31.496,7.239) R5.1 ; U1.11@31.887,16.901 31.887,16.89 31.892,16.885 U1.11@32.128,16.885 ; U1.16@32.087,14.344 32.094,14.351 33.147,14.351 v1@33.591,13.906 ; U1.11@32.11,16.867 U1.11@32.128,16.885 ; U1.7 33.835,16.769 ; v1@34.094,16.51 v1(34.163,16.51) ; v1(35.179,7.211) C2.1 ; U1.32_33 U1.32_33@37.683,15.123 ; 38.104,14.978 37.959,15.123 U1.32_33@37.683,15.123 ; U1.11@32.128,16.885 32.133,16.89 32.432,16.89 32.433,16.891 33.147,16.891 33.269,16.769 33.835,16.769 ; 33.835,16.769 33.835,15.721 33.935,15.621 v1(34.163,15.621) v1(35.052,15.621) v1(36.068,15.621) v1(36.957,15.621) 37.455,15.123 U1.32_33@37.683,15.123
  other v1: 10.287,7.112 11.557,7.112 12.827,7.112 14.097,7.112 68.453,7.239 69.723,7.239 70.993,7.239 72.263,7.239 10.287,8.128 11.557,8.128 12.827,8.128 14.097,8.128 68.453,8.255 69.723,8.255 70.993,8.255 72.263,8.255 10.287,9.144 11.557,9.144 12.827,9.144 14.097,9.144 68.453,9.271 69.723,9.271 70.993,9.271 72.263,9.271 38.989,9.525 10.287,10.16 11.557,10.16 12.827,10.16 14.097,10.16 68.453,10.287 69.723,10.287 70.993,10.287 72.263,10.287 39.751,11.049 10.287,11.176 11.557,11.176 12.827,11.176 14.097,11.176 68.453,11.303 69.723,11.303 70.993,11.303 72.263,11.303 10.287,12.192 11.557,12.192 12.827,12.192 14.097,12.192 68.453,12.319 69.723,12.319 70.993,12.319 72.263,12.319 10.287,13.208 11.557,13.208 12.827,13.208 14.097,13.208 68.453,13.335 69.723,13.335 70.993,13.335 72.263,13.335 33.655,13.97 10.287,14.224 11.557,14.224 12.827,14.224 14.097,14.224 68.453,14.351 69.723,14.351 70.993,14.351 72.263,14.351 37.338,14.478 38.354,14.478 39.37,14.605 40.386,14.605 41.402,14.605 33.147,14.732 34.163,14.732 33.147,15.621 38.227,15.621 39.37,15.621 40.386,15.621 41.402,15.621 33.147,16.51 41.402,16.637 36.449,28.067 37.465,28.067 38.481,28.067 39.497,28.067 40.513,28.067 36.449,29.083 37.465,29.083 38.481,29.083 39.497,29.083 40.513,29.083 35.941,32.004 36.957,32.004 35.941,33.02 36.957,33.02 35.941,34.036 36.957,34.036
NetC1_2: C1.2 U1.24 | length 2.9
  Layer 1 (TOP) w0.254: U1.24@35.285,12.892 35.308,12.869 35.308,12.482 36.368,11.422 37.071,11.422 C1.2
NetC2_2: C2.2 R1.1 U1.22 | length 28.7
  Layer 1 (TOP) w0.254: R1.1 24.08,15.384 24.08,8.305 26.162,6.223 35.306,6.223 36.195,7.112 36.195,8.472 35.858,8.809 35.229,9.438 35.129,9.438 34.564,10.003 34.437,10.003 34.335,10.105 U1.22@34.335,12.917
NetC3_1: C3.1 U1.6 | length 3
  Layer 1 (TOP) w0.254: C3.1 32.537,19.719 32.899,19.719 34.335,18.282 U1.6@34.335,17.817
NetC3_2: C3.2 R3.1 | length 1.4
  Layer 1 (TOP) w0.254: R3.1 31.564,21.216 C3.2
NetC11_1: 
NetC11_2: 
NetC16_2: 
NetGH1_1: GH1.1 U1.5 | length 2.6
  Layer 1 (TOP) w0.254: U1.5@34.812,17.84 34.835,17.817 34.835,18.649 34.544,18.94 34.544,19.905 GH1.1
NetGL1_1: GL1.1 U1.25 | length 9
  Layer 1 (TOP) w0.254: U1.25 35.835,12.721 35.837,12.719 35.865,12.719 36.108,12.476 36.108,12.432 36.3,12.24 39.576,12.24 42.341,9.475 42.341,9.221 GL1.1
NetI1_1: I1.1 U1.20 | length 7.3
  Layer 1 (TOP) w0.254: I1.1 29.429,8.636 33.312,12.519 33.312,12.894 U1.20@33.335,12.917
NetI1_2: I1.2 U1.19 | length 9.2
  Layer 1 (TOP) w0.254: I1.2 25.527,8.636 27.305,10.414 30.451,10.414 32.835,12.798 U1.19@32.835,12.917
NetI2_1: 
NetI3_1: 
NetI3_2: 
NetI4_2: 
NetJ3_1: 
NetJ3_2: 
NetJ4_2: 
NetJ5_1: 
NetJ5_2: 
NetJ7_1: 
NetL1_1: L1.1 U1.26_31
NetR1_2: R1.2 U1.13 | length 6.1
  Layer 1 (TOP) w0.254: R1.2 26.431,16.51 26.604,16.337 26.604,16.262 26.999,15.867 U1.13@32.11,15.867
NetR2_1: R2.1 R5.2 U1.21 | length 5.6
  Layer 1 (TOP) w0.254: R5.2 31.501,9.413 R2.1 33.274,9.445 33.274,10.157 33.835,10.718 U1.21@33.835,12.917
NetR3_2: R3.2 U1.4 | length 7.1
  Layer 1 (TOP) w0.254: R3.2 32.781,21.224 33.02,21.463 35.356,21.463 36.159,20.66 36.159,19.726 35.444,19.012 35.435,19.012 35.335,18.911 U1.4@35.335,17.817
NetR4_2: R4.2 U1.15 | length 3.5
  Layer 1 (TOP) w0.254: R4.2 29.352,13.258 29.65,13.556 29.7,13.556 31.011,14.867 U1.15@32.11,14.867
NetR6_2: R6.2 U1.17 | length 3.8
  Layer 1 (TOP) w0.254: R6.2 29.352,11.48 31.716,13.844 32.087,13.844 U1.17@32.11,13.867
NetR7_2: R7.2 U1.14 | length 3
  Layer 1 (TOP) w0.254: R7.2 29.337,15.036 29.635,15.334 29.702,15.334 29.735,15.367 U1.14@32.11,15.367
NetR8_2: 
NetR9_2: 
NetR10_2: 
NetR10_3: 
VBAT: C4.2 C5.1 J2.1 R2.2 TP2.1 U1.1_3_34 U1.23 | length 29.3
  Layer 1 (TOP) w0.254: v1(33.274,7.239) 33.274,8.081 R2.2 ; U1.23@34.835,12.917 34.835,11.654 36.898,9.591 C4.2 37.043,9.55 37.043,8.677 v1(37.084,8.636)
  Layer 4 (BOTTOM) w0.254: v1(26.543,22.098) 26.504,22.059 26.504,16.93 33.274,10.16 v1(33.274,7.239) 33.983,6.53 35.867,6.53 37.084,7.747 v1(37.084,8.636)
VBAT_IN: 
pads on no net: *1.1 *2.1 *3.1 *4.1 U1.8 U1.9 U1.10 U1.18

## Polygon pours and split planes (outlines as drawn)
GND on Layer 1 (TOP) "GND_L01_P025" (solid, pour order 25): 0.635,16.383 21.844,16.383 21.844,9.017 25.273,5.588 35.407,5.588 37.6,7.993 37.6,9.898 38.169,10.468 38.148,11.684 39.579,11.684 41.402,9.704 41.402,7.62 43.971,7.62 44.746,9.018 58.801,9.144 58.801,14.478 58.674,14.605 44.189,14.605 43.3,13.97 36.576,13.97 36.576,15.113 34.671,15.113 34.671,13.589 32.893,13.589 32.893,17.018 32.766,17.145 34.671,17.145 34.671,16.129 39.373,16.129 42.291,19.047 42.291,21.971 81.153,21.971 81.153,0.381 0.508,0.381
NetL1_1 on Layer 1 (TOP) "NETL1_1_L01_P022" (solid, pour order 22): 36.428,13.769 43.688,13.769 44.363,14.227 56.769,14.224 56.769,10.287 44.577,10.287 42.799,12.065 36.428,12.065
+12V on Layer 1 (TOP) "+12V_L01_P015" (solid, pour order 15): 40.259,36.068 81.026,36.068 81.026,22.606 41.91,22.606 41.91,30.734 40.386,30.734
GND on Layer 1 (TOP) "GND_L01_P014" (solid, pour order 14): 34.925,36.068 40.005,36.068 40.005,30.607 40.132,30.48 41.529,30.48 41.529,24.638 34.925,24.638
VBAT on Layer 1 (TOP) "VBAT_L01_P012" (solid, pour order 12): 0.508,35.941 34.671,35.941 34.662,24.701 41.859,24.701 41.871,18.847 39.321,16.383 35.16,16.383 35.16,17.148 35.7,17.166 35.7,18.511 36.576,19.418 36.595,20.972 35.7,21.717 31.115,21.717 31.115,21.336 0.758,21.336
GND on Layer 2 (GND) "GND_L02_P019" (solid, pour order 19): 0.381,36.068 81.153,36.068 81.153,0.508 81.026,0.381 0.508,0.381
GND on Layer 3 (GND) "GND_L03_P026" (solid, pour order 26): 0.381,36.068 81.153,36.068 81.153,0.508 81.026,0.381 0.508,0.381

## Silkscreen, mask and mechanical layers (free items; w line width, h text height)
Top Overlay:
  text "VBAT to 12V Buck Converter" at 19.812,2.667 h1
  text "Sian Friesen" at 19.685,0.762 h1

## Text inside footprints (layer, text, board x,y; h text height)
C5: Top Overlay "+" at 29.091,27.159 h1.2 r180